# EAGLE board CL02_V2 (EAGLE 9.6.2)
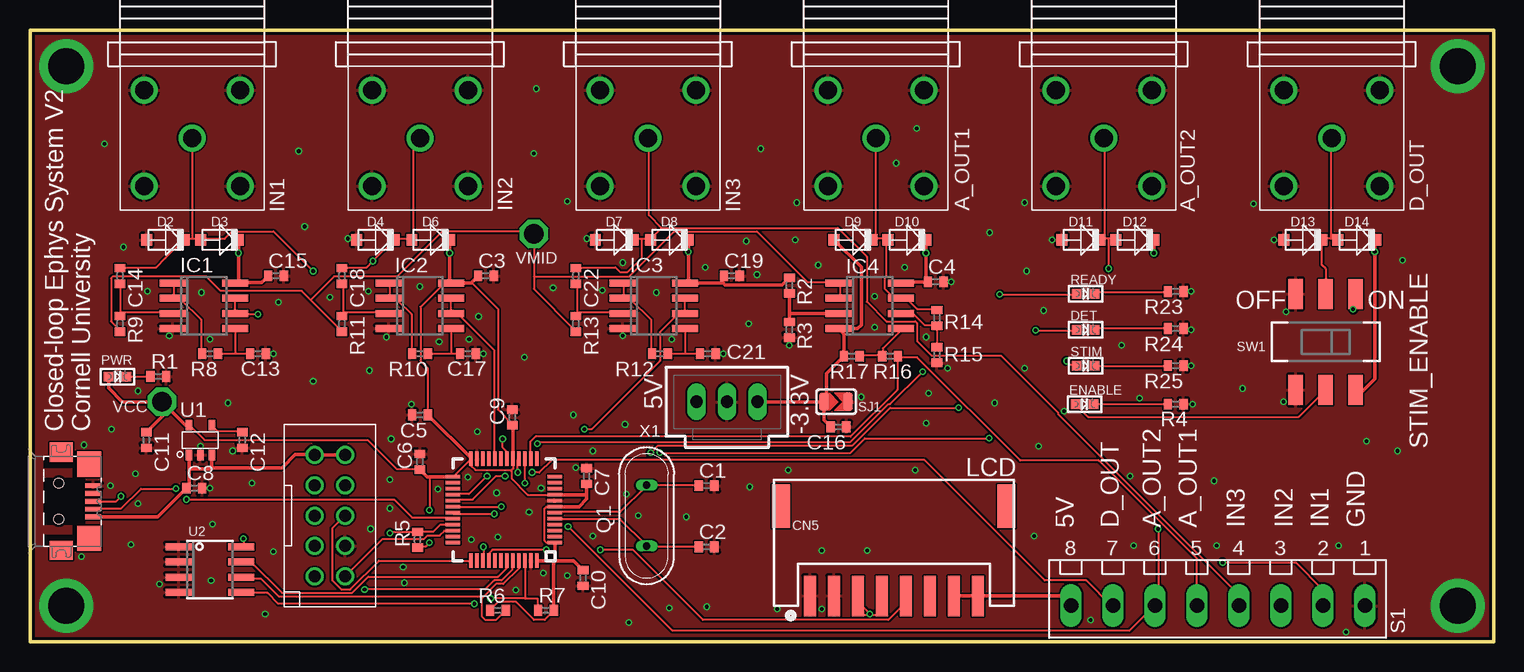
[diagram p0: board, top side]
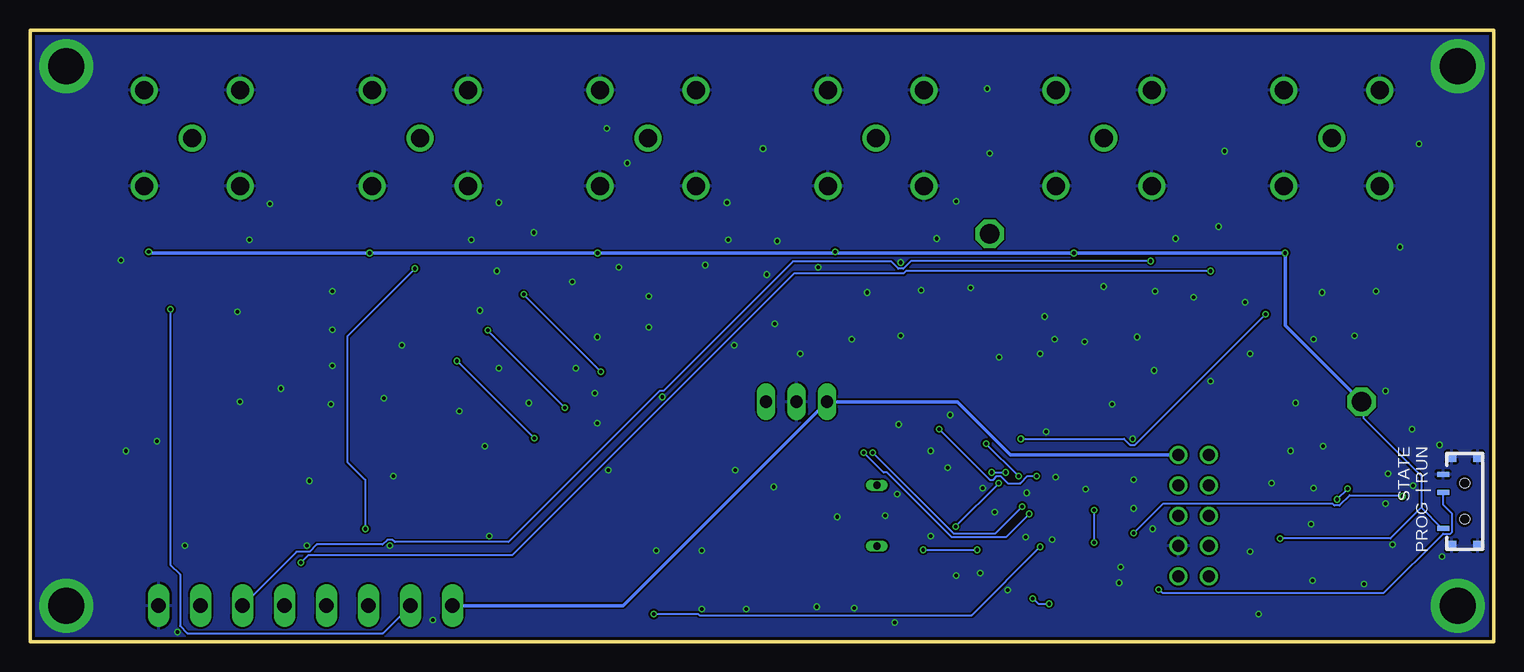
[diagram p1: board, bottom side, seen from below]

Size 122 x 51 mm. Coordinates in mm from the lower left corner, seen from the top.
Outline: 0,51 0,0 122,0 122,51 0,51
Copper layers (1+16): Top 0.012mm / dielectric 0.36mm / Bottom 0.012mm
Design rules "HQPCB_2layers_0.3mm_6mil": minimum track width 0.15mm, minimum drill 0.3mm, track to track 0.15mm, track to pad 0.15mm, pad to pad 0.15mm, via to via 0.15mm, smd to smd 0mil, copper to edge 0.25mm, drill to drill 0.35mm, minimum pad ring 0.125mm, minimum via ring 0.125mm, stop-mask expansion 0mil, vias tented up to drill 0.5mm, thermal gap 0.2mm
Net classes: 1 power: width 0.381 mm

## Footprints (pad centres in the part's own frame; a part is rotated, then mirrored left to right if it is on the bottom)
BNC_V_8MM = drill 1.5: P$1 -4,4; P$2 -4,-4; P$3 4,-4; P$4 4,4; SIG 0,0
C0402 = smd 0.7 x 0.9: 1 -0.65,0; 2 0.65,0
JSTPH8 = smd 1 x 3.4: 1 -7,-3.7; 2 -5,-3.7; 3 -3,-3.7; 4 -1,-3.7; 5 1,-3.7; 6 3,-3.7; 7 5,-3.7; 8 7,-3.7 | smd 1.5 x 3.6: NC1 -9.4,3.8; NC2 9.4,3.8
SOD-123 = smd 0.9 x 0.95: 1 1.575,0; 2 -1.575,0
CHIPLED_0603 = smd 0.8 x 0.8: A 0,-0.75; C 0,0.75
SO8 = smd 0.6 x 2.2: 1 -1.905,-2.6; 2 -0.635,-2.6; 3 0.635,-2.6; 4 1.905,-2.6; 5 1.905,2.6; 6 0.635,2.6; 7 -0.635,2.6; 8 -1.905,2.6
QS = drill 0.61 long: 1 -2.54,0; 2 2.54,0
R0402 = smd 0.7 x 0.9: 1 -0.65,0; 2 0.65,0
TERMINAL_BLOCK_3.5MM_8 = drill 1.2 long: 1 -12.28,0; 2 -8.78,0; 3 -5.28,0; 4 -1.78,0; 5 1.72,0; 6 5.22,0; 7 8.72,0; 8 12.22,0
SOLDERJUMPER_ARROW_NOPASTE = smd 0.762 x 1.524: 1 -1.016,0; 2 1.016,0
DPDT_SMT_JS202011SCQN = smd 1.2 x 2.5: P$1 -2.5,-4; P$2 0,-4; P$3 2.5,-4; P$4 2.5,4; P$5 0,4; P$6 -2.5,4
TSOT-23-5 = smd 0.55 x 0.9: 1 -0.95,-1.25; 2 0,-1.25; 3 0.95,-1.25; 4 0.95,1.25; 5 -0.95,1.25
SOIC8_150MIL = smd 0.6 x 2.2: 1 -1.905,-2.6; 2 -0.635,-2.6; 3 0.635,-2.6; 4 1.905,-2.6; 5 1.905,2.6; 6 0.635,2.6; 7 -0.635,2.6; 8 -1.905,2.6
LQFP48 = smd 1.2 x 0.3: P$1 -4.25,2.75; P$2 -4.25,2.25; P$3 -4.25,1.75; P$4 -4.25,1.25; P$5 -4.25,0.75; P$6 -4.25,0.25; P$7 -4.25,-0.25; P$8 -4.25,-0.75; P$9 -4.25,-1.25; P$10 -4.25,-1.75; P$11 -4.25,-2.25; P$12 -4.25,-2.75; P$25 4.25,-2.75; P$26 4.25,-2.25; P$27 4.25,-1.75; P$28 4.25,-1.25; P$29 4.25,-0.75; P$30 4.25,-0.25; P$31 4.25,0.25; P$32 4.25,0.75; P$33 4.25,1.25; P$34 4.25,1.75; P$35 4.25,2.25; P$36 4.25,2.75 | smd 0.3 x 1.2: P$13 -2.75,-4.25; P$14 -2.25,-4.25; P$15 -1.75,-4.25; P$16 -1.25,-4.25; P$17 -0.75,-4.25; P$18 -0.25,-4.25; P$19 0.25,-4.25; P$20 0.75,-4.25; P$21 1.25,-4.25; P$22 1.75,-4.25; P$23 2.25,-4.25; P$24 2.75,-4.25; P$37 2.75,4.25; P$38 2.25,4.25; P$39 1.75,4.25; P$40 1.25,4.25; P$41 0.75,4.25; P$42 0.25,4.25; P$43 -0.25,4.25; P$44 -0.75,4.25; P$45 -1.25,4.25; P$46 -1.75,4.25; P$47 -2.25,4.25; P$48 -2.75,4.25
2.54MM_2X5 = drill 1: P$1 -5.08,1.27; P$2 -2.54,1.27; P$3 0,1.27; P$4 2.54,1.27; P$5 5.08,1.27; P$6 5.08,-1.27; P$7 2.54,-1.27; P$8 0,-1.27; P$9 -2.54,-1.27; P$10 -5.08,-1.27
ZX62R-B-5P = smd 1.35 x 0.4: 1 2.675,-1.3; 2 2.675,-0.65; 3 2.675,0; 4 2.675,0.65; 5 2.675,1.3 | smd 1.9 x 1.6: M1 0,-4.1; M2 0,4.1 | smd 2 x 2.1: M3 2.35,3.1; M4 2.35,-3.1
CUS-12B = smd 0.8 x 0.8: G1 -3.7,1.1; G2 -3.7,-1.1; G3 3.7,1.1; G4 3.7,-1.1 | smd 0.4 x 1: P$1 -2.25,1.8; P$2 0.75,1.8; P$3 2.25,1.8 | hole 0.8: -1.5,0; 1.5,0
TESTPOINT = drill 1.6 octagon: 1 0,0
70543-03 = drill 1.016 long: 1 -2.54,0; 2 0,0; 3 2.54,0

## Placement (x,y rotation side)
A_OUT1  BNC_8MM  [BNC_V_8MM]  70.5,42 90 top
A_OUT2  BNC_8MM  [BNC_V_8MM]  89.5,42 90 top
C1  18p  [C0402]  56.4,13 0 top
C2  18p  [C0402]  56.4,7.9 0 top
C3  10u  [C0402]  38,30.5 0 top
C4  10u  [C0402]  75.5,30 0 top
C5  10u  [C0402]  32.5,18.9 180 top
C6  10u  [C0402]  32.5,15 90 top
C7  10u  [C0402]  46.4,13.8 270 top
C8  10u  [C0402]  13.7,12.8 0 top
C9  10u  [C0402]  40.2,18.7 90 top
C10  10u  [C0402]  46.1,5.3 270 top
C11  10u  [C0402]  9.7,16.8 270 top
C12  33n  [C0402]  17.7,16.8 270 top
C13  33n  [C0402]  19,24 0 top
C14  10u  [C0402]  7.5,30.5 270 top
C15  10u  [C0402]  20.5,30.5 0 top
C16  10u  [C0402]  67.4,17.9 180 top
C17  33n  [C0402]  36.5,24 0 top
C18  10u  [C0402]  26,30.5 270 top
C19  10u  [C0402]  58.5,30.5 0 top
C21  33n  [C0402]  56.5,24 0 top
C22  10u  [C0402]  45.5,30.5 270 top
CN5  [JSTPH8]  72,7.5 0 top
D2  MMSZ4684T1GOSCT-ND  [SOD-123]  11.3,33.5 0 top
D3  MMSZ4684T1GOSCT-ND  [SOD-123]  15.8,33.5 0 top
D4  MMSZ4684T1GOSCT-ND  [SOD-123]  28.8,33.5 0 top
D6  MMSZ4684T1GOSCT-ND  [SOD-123]  33.4,33.5 0 top
D7  MMSZ4684T1GOSCT-ND  [SOD-123]  48.7,33.5 0 top
D8  MMSZ4684T1GOSCT-ND  [SOD-123]  53.3,33.5 0 top
D9  MMSZ4684T1GOSCT-ND  [SOD-123]  68.6,33.5 0 top
D10  MMSZ4684T1GOSCT-ND  [SOD-123]  73.1,33.5 0 top
D11  MMSZ4684T1GOSCT-ND  [SOD-123]  87.6,33.5 0 top
D12  MMSZ4684T1GOSCT-ND  [SOD-123]  92.1,33.5 0 top
D13  MMSZ4684T1GOSCT-ND  [SOD-123]  106.1,33.5 0 top
D14  MMSZ4684T1GOSCT-ND  [SOD-123]  110.6,33.5 0 top
D_OUT  BNC_8MM  [BNC_V_8MM]  108.5,42 90 top
DET  [CHIPLED_0603]  88,26 270 top
ENABLE  [CHIPLED_0603]  87.9,19.8 270 top
IC1  AD8532  [SO8]  14.5,28 270 top
IC2  AD8532  [SO8]  32.5,28 270 top
IC3  AD8532  [SO8]  52,28 270 top
IC4  AD8532  [SO8]  70,28 270 top
IN1  BNC_8MM  [BNC_V_8MM]  13.5,42 90 top
IN2  BNC_8MM  [BNC_V_8MM]  32.5,42 90 top
IN3  BNC_8MM  [BNC_V_8MM]  51.5,42 90 top
PWR  [CHIPLED_0603]  7.3,22.1 270 top
Q1  12MHz  [QS]  51.4,10.5 90 top
R1  10k  [R0402]  10.7,22.1 180 top
R2  10k  [R0402]  63.3,29.7 270 top
R3  10k  [R0402]  63.3,26 270 top
R4  10k  [R0402]  95.5,19.8 180 top
R5  1.5k  [R0402]  32.3,8.5 90 top
R6  1.5k  [R0402]  39,2.6 180 top
R7  1.5k  [R0402]  43,2.6 0 top
R8  10k  [R0402]  15,24 180 top
R9  100k  [R0402]  7.5,26.5 270 top
R10  10k  [R0402]  32.5,24 180 top
R11  100k  [R0402]  26,26.5 270 top
R12  10k  [R0402]  52.5,24 180 top
R13  100k  [R0402]  45.5,26.5 270 top
R14  10k  [R0402]  75.6,27 90 top
R15  10k  [R0402]  75.6,23.9 90 top
R16  10k  [R0402]  71.7,23.8 180 top
R17  20k  [R0402]  68.5,23.8 0 top
R23  10k  [R0402]  95.5,29.2 180 top
R24  10k  [R0402]  95.5,26.1 180 top
R25  10k  [R0402]  95.5,23 180 top
READY  [CHIPLED_0603]  88,29 270 top
S1  TERMINAL_BLOCK_8-3.5MM  [TERMINAL_BLOCK_3.5MM_8]  99,3 180 top
SJ1  [SOLDERJUMPER_ARROW_NOPASTE]  67.2,20 0 top
STIM  [CHIPLED_0603]  88,23 270 top
SW1  [DPDT_SMT_JS202011SCQN]  108,25 180 top
U1  TPS79333  [TSOT-23-5]  14.2,16.8 0 top
U2  [SOIC8_150MIL]  15,6 270 top
U$1  STM32F373CCT6  [LQFP48]  39.5,11 180 top
U$9  2.54MM_2X5  [2.54MM_2X5]  25,10.5 90 top
U$10  MICRO-USB-ZX62R-B-5P  [ZX62R-B-5P]  2.6,11.7 0 top
U$12  CUS-12B  [CUS-12B]  2.4,11.7 90 bottom
VCC  TESTPOINT  [TESTPOINT]  11,20 0 top
VMID  TESTPOINT  [TESTPOINT]  42,34 0 top
X1  C-GRID-03-70543  [70543-03]  58.1,20 0 top

## Library data of the parts
A_OUT1 A_OUT2 D_OUT IN1-IN3 U$1 U$9 U$12 = HD128
C1-C19 C21 C22 = eagle-ltspice; SPICEMODEL: NONE; SPICEPREFIX: C
CN5 DET ENABLE PWR READY STIM SW1 U2 = microbuilder
D2-D4 D6-D14 = INTAN_largeBGA
IC1-IC4 = analog-devices; MF: ALTERA CORPORATION; MPN: AD8542ARZ-REEL; OC_FARNELL: 1424150; OC_NEWARK: 59K6827
Q1 = special
R1-R17 R23-R25 = eagle-ltspice; SPICEMODEL: NONE; SPICEPREFIX: R
S1 = RHD2000_eval_board
SJ1 = microSD; BOM: EXCLUDE
U1 VCC VMID = harrison
U$10 = con-hirose
X1 = con-molex; MF: MOLEX; OC_FARNELL: unknown; OC_NEWARK: unknown

## Nets
5VDC: C8.1 CN5.7 CN5.8 S1.8 U1.1 U1.3 U$9.P$5 U$9.P$6 U$10.1 X1.1
AOUT1: R16.1 S1.5 U$1.P$14
AOUT1_BUF: A_OUT1.SIG D9.1 D10.2 IC4.7 R14.2
AOUT2: A_OUT2.SIG D11.1 D12.2 S1.6 U$1.P$15
BOOT0: U$1.P$44 U$12.P$2
BUTTON0: U$1.P$26
BUTTON1: U$1.P$27
DOUT: S1.7 SW1.P$1 U$1.P$16
GAIN: U$1.P$10
GND: A_OUT1.P$1 A_OUT1.P$2 A_OUT1.P$3 A_OUT1.P$4 A_OUT2.P$1 A_OUT2.P$2 A_OUT2.P$3 A_OUT2.P$4 C1.2 C2.2 C3.2 C4.2 C5.2 C6.2 C7.1 C8.2 C9.2 C10.2 C11.2 C12.2 C13.2 C15.2 C16.1 C17.2 C19.2 C21.2 CN5.1 CN5.2 D2.2 D4.2 D7.2 D11.2 D13.2 D_OUT.P$1 D_OUT.P$2 D_OUT.P$3 D_OUT.P$4 IC1.4 IC2.4 IC3.4 IN1.P$1 IN1.P$2 IN1.P$3 IN1.P$4 IN2.P$1 IN2.P$2 IN2.P$3 IN2.P$4 IN3.P$1 IN3.P$2 IN3.P$3 IN3.P$4 R1.1 R3.2 R4.1 R15.1 R23.1 R24.1 R25.1 S1.1 SJ1.2 SW1.P$3 SW1.P$4 U1.2 U2.1 U2.2 U2.3 U2.4 U$1.P$8 U$1.P$23 U$1.P$47 U$9.P$9 U$10.5 U$12.G1 U$12.G2 U$12.G3 U$12.G4 U$12.P$3 X1.2
GPIO3: D13.1 D14.2 D_OUT.SIG SW1.P$2
I2C_SCL: R6.1 U2.6 U$1.P$45
I2C_SDA: R7.1 U2.5 U$1.P$46
IN1: C14.1 D2.1 D3.2 IN1.SIG S1.2
IN1_BUF: IC1.6 IC1.7 U$1.P$18
IN2: C18.1 D4.1 D6.2 IN2.SIG S1.3
IN2_BUF: IC2.6 IC2.7 U$1.P$20
IN3: C22.1 D7.1 D8.2 IN3.SIG S1.4
IN3_BUF: IC3.6 IC3.7 U$1.P$28
LED0: READY.A U$1.P$29
LED1: DET.A U$1.P$30
LED2: STIM.A U$1.P$31
LED_STIMON: ENABLE.A SW1.P$5
N$1: C12.1 U1.4
N$2: IC2.1 IC2.2 R10.2
N$3: R25.2 STIM.C
N$4: C17.1 IC2.5 R10.1
N$5: IC1.1 IC1.2 R8.2
N$6: C13.1 IC1.5 R8.1
N$7: C2.1 Q1.1 U$1.P$5
N$8: C1.1 Q1.2 U$1.P$6
N$9: C18.2 IC2.3 R11.1
N$12: IC4.3 R2.2 R3.1
N$13: IC3.1 IC3.2 R12.2
N$14: C21.1 IC3.5 R12.1
N$15: C22.2 IC3.3 R13.1
N$17: C14.2 IC1.3 R9.1
N$19: PWR.C R1.2
N$21: IC4.6 R14.1 R15.2
N$22: DET.C R24.2
N$23: R23.2 READY.C
N$24: ENABLE.C R4.2
N$25: IC4.5 R16.2 R17.2
N$28: U$1.P$42
NC: CN5.6
NRST: U$9.P$1
SPI1_MOSI: U$1.P$41
SPI1_NSS: U$1.P$38
SWA0: U$1.P$11
SWA1/BLE_TX: U$1.P$12
SWA2/BLE_RX: U$1.P$13
SWCLK: U$1.P$37 U$9.P$8
SWDIO: U$1.P$34 U$9.P$10
UART2_RX: CN5.5 U$1.P$40
UART2_TX: CN5.3 CN5.4 U$1.P$39
USB_D+: R5.2 U$1.P$33 U$10.3
USB_D-: U$1.P$32 U$10.2
VCC: C3.1 C4.1 C5.1 C6.1 C7.2 C9.1 C10.1 C11.1 C15.1 C19.1 D3.1 D6.1 D8.1 D10.1 D12.1 D14.1 IC1.8 IC2.8 IC3.8 IC4.8 PWR.A R2.1 R5.1 R6.2 R7.2 SW1.P$6 U1.5 U2.8 U$1.P$1 U$1.P$7 U$1.P$9 U$1.P$17 U$1.P$24 U$1.P$25 U$1.P$48 U$12.P$1 VCC.1
VCC/2: IC4.1 IC4.2 R9.2 R11.2 R13.2 VMID.1
VSS: C16.2 D9.2 IC4.4 R17.1 SJ1.1 X1.3
WP: U2.7 U$1.P$43

## Tracks (layer width: path | path; a pad name or v marks a point on that pad's centre or on a via)
5VDC
  Top 0.3: U$10.1 10.65,10.4 C8.1 13.25,13 13.25,14.3 | U1.1 13.25,14.3 | 13.25,14.3 13.35,14.4 15.1,14.4 15.15,14.45 15.15,14.5 | 15.15,14.5 U1.3 | 15.15,14.5 21,14.5 22.1,15.6 23.71,15.6 U$9.P$5 U$9.P$6 | CN5.7 CN5.8 | CN5.8 79.1,3.8 79.4,3.5 79.3,3.5 CN5.8 | CN5.8 85.98,3.8 S1.8
  Bottom 0.3: U$9.P$6 40.28,15.58 44.7,20 X1.1 72.56,3 S1.8
AOUT1
  Top 0.15: S1.5 97.28,6.92 89.1,15.1 82.55,15.1 73.95,23.7 72.45,23.7 R16.1 72.3,23.7 72.3,21 68.4,17.1 42.15,17.1 41.7,16.65 41.7,15.3 U$1.P$14
AOUT1_BUF
  Top 0.15: 70.5,33.6 71.4,33.6 D10.2 71.4,33.45 71.4,30.45 71.25,30.3 71.25,29.4 72,28.65 IC4.7 72.6,28.5 73.2,28.5 73.95,27.75 75.6,27.75 R14.2 | 70.5,33.6 70.2,33.6 D9.1 70.5,33.6 | 70.5,33.6 A_OUT1.SIG
AOUT2  (via drill 0.3)
  Top 0.15: 89.9,33.6 90.45,33.6 D12.2 | 89.9,33.6 89.55,33.6 | 89.55,33.6 89.25,33.6 D11.1 89.55,33.6 | 89.55,33.6 89.55,42 A_OUT2.SIG | v41.25,13.2 U$1.P$15 | v44.85,9.6 53.55,0.9 91.65,0.9 93.67,2.92 93.75,3 | 93.75,3 S1.6 | 89.9,33.6 v89.9,31.1 | v94.05,9.4 94.05,3.3 93.75,3
  Bottom 0.15: v44.85,9.6 v41.25,13.2 | v89.9,31.1 95.55,25.45 95.55,15 94.05,13.5 v94.05,9.4
BOOT0  (via drill 0.3)
  Top 0.15: v27.9,4.35 37.95,4.35 38.7,5.1 39.3,5.1 40.2,6 40.2,6.75 U$1.P$44
  Bottom 0.15: U$12.P$2 4.2,11.4 3.45,10.65 3.45,9.15 3.6,9 4.2,9 9.15,4.05 27.6,4.05 v27.9,4.35
DOUT  (via drill 0.3)
  Top 0.15: v40.65,14.1 40.65,15.15 U$1.P$16 | v41.85,14.1 42.45,14.1 43.5,15.15 74.55,15.15 84.6,5.1 88.05,5.1 90.15,3 S1.7 | SW1.P$1 110.5,27.9 v110.3,27.7
  Bottom 0.15: v41.85,14.1 v40.65,14.1 | v110.3,27.7 110.3,6.4 109.5,5.6 109.5,1.31 108.89,0.7 92.58,0.7 S1.7
GND  (via drill 0.3, 3)
  other vias: 49.9,1.6 53.3,2.8 56.4,2.9 66,7.6 69.8,7.6 62.3,2.7 54.7,10.4 60,12.9 88.4,1.8 83.7,8.8 98.9,8 92,8 91.7,13.8 98.7,13.4 109.7,0.8 109.1,8 102,36.5 82.9,36.6 63.9,36.6 42.2,46.1 44.8,36.7 22.9,34.6 7.8,32.9 26.5,33.6 46.4,33.6 49.4,25.5 29.7,25.4 11.6,25.5 20.3,24 37.8,24 57.8,24 63.3,24.7 76.5,22.8 76.8,30 96.8,29.2 96.8,26 96.8,23 104.7,27.5 104.5,20 103.7,33.5 85.2,33.5 14.2,16.3 15,12.8 10.8,4.8 6.7,13 4.3,7.1 4.5,16.4 66,2.7 111.4,16.7 69.3,20.4 45.5,14.5 31.8,19.8 30.1,16.9 30,13.5 16.9,15.9 60.6,30.6 42.8,5.7 40.5,4.3 36.8,8.5 38.9,12.4 36.5,13.7 34,12.7 63.2,14.3 23.6,21.7 28.3,22.6 37.3,17.5 41.2,23.7 37.4,27.1 32.5,29.6 25,28.7 43.6,29.5 49.4,31.6 74.9,20.7 74.7,18.2 46.9,15.9 19.6,2.3 9,11.5 6.8,17.7 8.8,14 8.4,8.1 15.2,9.8 20.3,7.5 20.7,28.3 42.6,12.8 41.6,10.8 39,8.7 50.7,10.5 46.9,8.8 49.7,12.3 31.1,6.2 47.7,29.3 34.1,25 53.5,25.2 28.2,29.2 9.8,29.2 82.9,22.8 86.2,19.2 92.5,20.3 80,34.1 83.1,30.9 84.5,27.6 91,24.7 114.4,31.8 114,15.9 65.7,31.4 63.8,33.5 59.7,33.4 56.3,31.2 59.9,26.5 52.2,29.1 42,40.7 60.9,41.1 22.4,40.9 6.2,41.5 28.4,9.4 18.5,13.2 15.1,5.1 9,20.9 45.3,18.9 49.6,18.1 73.8,14.3 80.4,19.9 84.1,16.3 72.2,39.9 73.9,42.8 44.8,5.5 14.3,29.1 101.1,21.1 30,11.1 31.2,4.9 119,3 119,48 3,48 3,3 74.7,25.4 70.4,26.2 70.4,28.8 72.9,31.2 36.6,25.2 15,25.2 16.5,19.9 96.9,19.8
  pour Top: 0,52 123,52 123,-2 0,-2
  pour Bottom: 0,52 123,52 123,-2 0,-2
GPIO3
  Top 0.15: 108.45,33.6 108.9,33.6 D14.2 | 108.45,33.6 107.7,33.6 D13.1 107.7,33.45 107.7,31.4 108,31.1 SW1.P$2 | 108.45,33.6 108.45,42 D_OUT.SIG
I2C_SCL
  Top 0.15: R6.1 38.85,1.8 37.95,1.8 37.65,2.1 37.65,3.6 37.8,3.75 | 37.8,3.75 38.85,4.8 39.45,4.8 40.75,6.1 U$1.P$45 | 37.8,3.75 20.75,3.75 19.25,5.25 17.7,5.25 U2.6
I2C_SDA  (via drill 0.3)
  Top 0.15: U$1.P$46 41.25,3.6 | R7.1 42.3,2.7 42.3,3.6 41.25,3.6 | v37.05,3.15 20.7,3.15 19.8,4.05 17.7,4.05 U2.5 | 41.25,3.6 v38.4,3.6
  Bottom 0.15: v37.05,3.15 37.95,3.15 v38.4,3.6
IN1  (via drill 0.3)
  Top 0.15: C14.1 7.5,31.2 10.5,31.2 11.28,31.98 12.75,33.45 D2.1 12.9,33.6 13.5,33.6 | 13.5,33.6 13.7,33.6 14.1,33.6 | 14.1,33.6 D3.2 | IN1.SIG 13.5,33.6 | 14.1,33.6 16.23,33.6 16.83,34.2 20.3,34.2 v23.6,30.9 | v99.4,6.6 105.5,6.6 107.78,4.32 S1.2
  Bottom 0.15: v23.6,30.9 48.97,30.9 49.17,30.7 58.29,30.7 81.79,7.2 98.8,7.2 v99.4,6.6
IN1_BUF  (via drill 0.3)
  Top 0.15: v19,27.3 17.1,27.3 IC1.6 IC1.7 | U$1.P$18 39.73,15.28 39.73,15.84 39.4,16.17 v39.4,16.9
  Bottom 0.15: v39.4,16.9 30.81,16.9 30.31,16.4 29.89,16.4 29.6,16.69 29.6,16.7 v19,27.3
IN2  (via drill 0.3)
  Top 0.15: C18.1 26.1,31.2 28.05,31.2 v28.57,31.73 30.3,33.45 D4.1 30.45,33.6 31.8,33.6 D6.2 31.95,33.6 31.95,41.55 32.4,42 IN2.SIG
  Bottom 0.15: v28.57,31.73 48.57,31.73 49.19,31.1 49.61,31.1 50.21,31.7 58.4,31.7 69.2,20.9 69.51,20.9 82.11,8.3 91.59,8.3 91.79,8.5 92.21,8.5 92.61,8.1 98.09,8.1 98.69,7.5 99.78,7.5 S1.3
IN2_BUF
  Top 0.15: U$1.P$20 38.7,15.3 38.7,24.3 35.7,27.3 35.1,27.3 IC2.6 IC2.7
IN3
  Top 0.15: C22.1 45.6,31.2 48.8,31.2 49.2,30.8 49.81,30.8 51,31.99 51,33.6 | 51,33.6 50.4,33.6 D7.1 | 51,33.6 51.6,33.6 D8.2 51.75,33.6 52.65,34.5 | S1.4 100.78,3.91 85.7,18.99 85.7,19.1 80.95,23.85 75.15,23.85 73.95,25.05 73.95,26.55 73.8,26.7 71.4,26.7 69.75,28.35 69.75,32.1 67.35,34.5 52.65,34.5 | 52.65,34.5 51.6,35.55 51.6,42 IN3.SIG
IN3_BUF  (via drill 0.3)
  Top 0.15: v38.1,13.8 36.6,12.3 35.25,12.3 U$1.P$28 | v46.2,17.7 46.8,17.7 52.5,23.4 52.5,25.8 54,27.3 54.6,27.3 IC3.6 IC3.7
  Bottom 0.15: v38.1,13.8 38.85,13.8 39.45,13.2 40.5,13.2 41.1,13.8 41.4,13.8 41.7,13.5 42,13.5 v46.2,17.7
LED0  (via drill 0.3)
  Top 0.15: v80.85,28.95 87.15,28.95 READY.A | v74.4,22.5 71.7,19.8 71.55,19.8 68.4,16.65 42.45,16.65 v42.3,16.5 | v39.6,13.8 38.85,13.8 36.9,11.85 35.25,11.85 U$1.P$29
  Bottom 0.15: v74.4,22.5 v80.85,28.95 | v39.6,13.8 v42.3,16.5
LED1  (via drill 0.3)
  Top 0.15: v83.85,25.95 87.15,25.95 DET.A | v77.4,19.5 71.7,19.5 68.55,16.35 52.35,16.35 v51.75,15.75 | U$1.P$30 v39.3,11.25
  Bottom 0.15: v77.4,19.5 v83.85,25.95 | v51.75,15.75 45,9 41.55,9 v39.3,11.25
LED2  (via drill 0.3)
  Top 0.15: v86.4,23.4 86.7,23.1 87.25,23.1 STIM.A | v79.95,16.95 69.6,16.95 68.4,15.75 v52.5,15.75 | v38.7,10.65 35.25,10.65 U$1.P$31
  Bottom 0.15: v79.95,16.95 v86.4,23.4 | v52.5,15.75 50.85,14.1 50.55,14.1 45.15,8.7 40.65,8.7 v38.7,10.65
LED_STIMON
  Top 0.15: SW1.P$5 105.75,18.75 88.2,18.75 ENABLE.A
N$1
  Top 0.15: C12.1 17.7,17.55 15.6,17.55 15.15,18 U1.4
N$2
  Top 0.15: R10.2 31.8,24 31.8,27.3 30.6,28.5 30,28.5 IC2.2 30,28.65 30,29.85 IC2.1
N$3
  Top 0.15: STIM.C 88.8,22.95 94.8,22.95 R25.2
N$4
  Top 0.15: C17.1 35.1,24 | 35.1,24 R10.1 | IC2.5 35.1,24
N$5
  Top 0.15: R8.2 14.25,24 14.25,26.85 12.6,28.5 12,28.5 IC1.2 12,28.65 12,29.85 IC1.1
N$6
  Top 0.15: C13.1 17.1,24 | 17.1,24 R8.1 | IC1.5 17.1,24
N$7
  Top 0.15: C2.1 55.65,7.95 51.45,7.95 Q1.1 51.3,8.1 49.2,10.2 43.8,10.2 U$1.P$5
N$8
  Top 0.15: C1.1 55.65,13.05 51.45,13.05 Q1.2 51.3,12.9 49.2,10.8 43.8,10.8 U$1.P$6
N$9
  Top 0.15: 26.1,27.45 26.1,29.85 C18.2 | 26.1,27.45 26.1,27.15 R11.1 26.1,27.45 | 26.1,27.45 29.85,27.45 IC2.3
N$12
  Top 0.3: R3.1 63.3,27.4 | 63.3,27.4 R2.2 | IC4.3 63.34,27.36 63.3,27.4
N$13
  Top 0.15: R12.2 51.75,24 51.75,26.85 50.1,28.5 49.5,28.5 IC3.2 49.5,28.65 49.5,29.85 IC3.1
N$14
  Top 0.15: C21.1 54.6,24 | 54.6,24 R12.1 | IC3.5 54.6,24
N$15
  Top 0.15: 45.6,27.45 45.6,29.85 C22.2 | 45.6,27.45 45.6,27.15 R13.1 45.6,27.45 | 45.6,27.45 49.35,27.45 IC3.3
N$17
  Top 0.15: C14.2 7.5,27.45 | 7.5,27.45 11.85,27.45 IC1.3 | 7.5,27.45 R9.1
N$19
  Top 0.15: PWR.C 8.1,22.05 10.05,22.05 R1.2
N$21
  Top 0.15: R15.2 R14.1 75.6,26.4 74.55,26.4 73.65,27.3 72.6,27.3 IC4.6
N$22
  Top 0.15: R24.2 88.8,26.1 DET.C
N$23
  Top 0.15: READY.C 88.8,29.1 94.8,29.1 R23.2
N$24
  Top 0.15: ENABLE.C R4.2
N$25
  Top 0.15: R17.2 69.15,23.85 70.95,23.85 R16.2 71.1,23.85 71.1,24.45 72.6,25.95 IC4.5
SWCLK
  Top 0.15: U$1.P$37 29.1,6.75 26.7,4.35 25.95,4.35 25.2,5.1 25.2,9.45 26.25,10.5 U$9.P$8
SWDIO
  Top 0.15: U$1.P$34 34.55,9.25 34.15,8.85 33.15,8.85 32.85,8.55 29.4,8.55 U$9.P$10
UART2_RX  (via drill 0.3)
  Top 0.15: U$1.P$40 38.25,7.35 38.55,7.65 v43.05,7.65 | v47.55,7.65 50.25,7.65 56.1,1.8 71.55,1.8 72.9,3.15 72.9,3.75 CN5.5
  Bottom 0.15: v47.55,7.65 v43.05,7.65
UART2_TX  (via drill 0.3)
  Top 0.15: CN5.4 71,2.2 69,2.2 CN5.3 69,3.3 v70,2.3 | v37.8,7.9 37.8,6.8 U$1.P$39
  Bottom 0.15: v70,2.3 66.31,2.3 66.21,2.2 43.5,2.2 v37.8,7.9
USB_D+  (via drill 0.3)
  Top 0.15: U$1.P$33 34.2,9.75 33.6,9.15 R5.2 30.1,9.15 v30,9.05 | U$10.3 7.2,11.7 v7.6,12.1
  Bottom 0.15: v7.6,12.1 7.7,12.2 11.99,12.2 12.84,11.35 13.26,11.35 13.38,11.47 27.57,11.47 v30,9.05
USB_D-  (via drill 0.3)
  Top 0.15: v13.05,11.85 30.35,11.85 31.85,10.35 35.25,10.35 U$1.P$32 | v12.15,12.75 9.25,12.75 7.6,11.1 5.4,11.1 U$10.2
  Bottom 0.15: v12.15,12.75 v13.05,11.85
VCC  (via drill 0.3, 0.33)
  Top 0.15: R6.2 38.4,2.7 39,3.3 40.5,3.3 42,1.8 42.9,1.8 43.65,2.55 R7.2 | U$1.P$7 43.05,11.25 42.9,11.1 42.9,8.4 43.05,8.25 U$1.P$1 | v33.3,8.25 33,7.95 32.4,7.95 R5.1 | 33.3,13.75 v33.3,10.95 | C9.1 40.2,18.15 39,19.35 39,27.75 36.9,29.85 36.76,29.91 | C6.1 32.4,14.4 30.55,14.4 28.15,16.8 14.55,16.8 13.35,18 U1.5 | C5.1 33.15,22.8 32.55,23.4 32.55,27.9 34.5,29.85 34.95,29.85 IC2.8 | U$1.P$17 40.25,14.41 40.15,14.31 40.15,14.16 | 40.15,14.16 40.15,13.59 41.49,12.25 U$1.P$9 | U$1.P$25 U$1.P$24 36.77,15.22 36.77,14.66 37.13,14.3 40.01,14.3 40.15,14.16 | v17.8,8.6 17.8,8.11 U2.8
  Top 0.3: IC3.8 54.8,29.91 | 54.8,29.91 57.55,29.91 | 57.55,29.91 57.85,30.2 C19.1 | 57.55,29.91 57.8,29.91 57.95,29.75 62.7,29.75 R2.1 | D8.1 v54.88,32.5 54.88,29.98 54.8,29.91 | D10.1 v74.67,32.4 74.67,30.18 C4.1 72.69,30 IC4.8 | D6.1 v34.98,32.4 34.98,30.03 IC2.8 36.76,29.91 C3.1 | D3.1 v17.38,32.4 17.38,30.18 17.15,29.95 | 17.15,29.95 IC1.8 | C15.1 19.3,29.95 17.15,29.95 | U1.5 12.95,18.05 11.05,19.95 | 11.05,19.95 VCC.1 7.7,20 6.55,21.15 PWR.A | C11.1 11.05,18.8 11.05,19.95 | D12.1 93.67,32.42 v93.7,32.4 | D14.1 112.1,33.42 v112.1,32.5 112.1,21.9 111.1,20.9 110.6,20.9 SW1.P$6 | U$1.P$25 33.3,13.75 33.1,13.75 C6.1 | U$1.P$17 40.25,18 C9.1 | C5.1 36.75,15.3 U$1.P$24 | U$1.P$7 45.75,11.25 46.4,11.9 46.4,12.3 | C7.2 46.4,12.3 | U$1.P$9 46.35,12.25 46.4,12.3 | C10.1 45.3,6.75 43.8,6.75 | U$1.P$48 43.8,6.75 | R7.2 43.65,6.6 43.8,6.75 | U$1.P$1 43.75,6.8 43.8,6.75
  Bottom 0.15: v33.3,10.95 v33.3,8.25 | U$12.P$1 4.3,9.45 6.03,11.18 | VCC.1 10.8,19.8 10.8,18.6 6.03,13.82 6.03,11.18 | 6.03,11.18 8.6,8.6 v17.8,8.6
  Bottom 0.3: v112.1,32.5 112,32.4 v93.7,32.4 v74.67,32.4 54.98,32.4 v54.88,32.5 54.77,32.4 v34.98,32.4 v17.38,32.4 17.38,26.38 VCC.1
VCC/2
  Top 0.15: 23.4,28.5 25.95,25.95 R11.2 | 23.4,28.5 22.65,29.25 15.9,29.25 14.7,30.45 6.9,30.45 6.75,30.3 6.75,26.7 7.5,25.95 R9.2 | IC4.2 67.5,28.65 67.5,29.85 IC4.1 67.35,30 64.8,30 60.6,34.2 53.7,34.2 49.95,30.45 42,30.45 | 42,30.45 VMID.1 42,34.05 41.85,34.2 34.35,34.2 30.6,30.45 25.35,30.45 23.4,28.5 | 42,30.45 42,29.4 45.45,25.95 R13.2
VSS
  Top 0.3: X1.3 SJ1.1 66.18,19.9 | C16.2 66.18,18.47 66.18,19.9 | 66.18,19.9 66.4,20.12 66.4,22.35 R17.1 67.85,25.64 IC4.4 69,26.09 69.3,26.4 69.3,31.23 D9.2
WP
  Top 0.15: U$1.P$43 39.75,6.15 39,5.4 28.2,5.4 26.85,4.05 21,4.05 18.45,6.6 17.7,6.6 U2.7

## Text on the board
tPlace: OFF | ON | 5V | Closed-loop Ephys System V2 / Cornell University | -3.3V | STIM_ENABLE | LCD | 5V | D_OUT | A_OUT2 | A_OUT1 | IN3 | IN2 | IN1 | GND
bPlace: STATE / PROG | RUN